# EAGLE board Radarv3 (EAGLE 6.3)
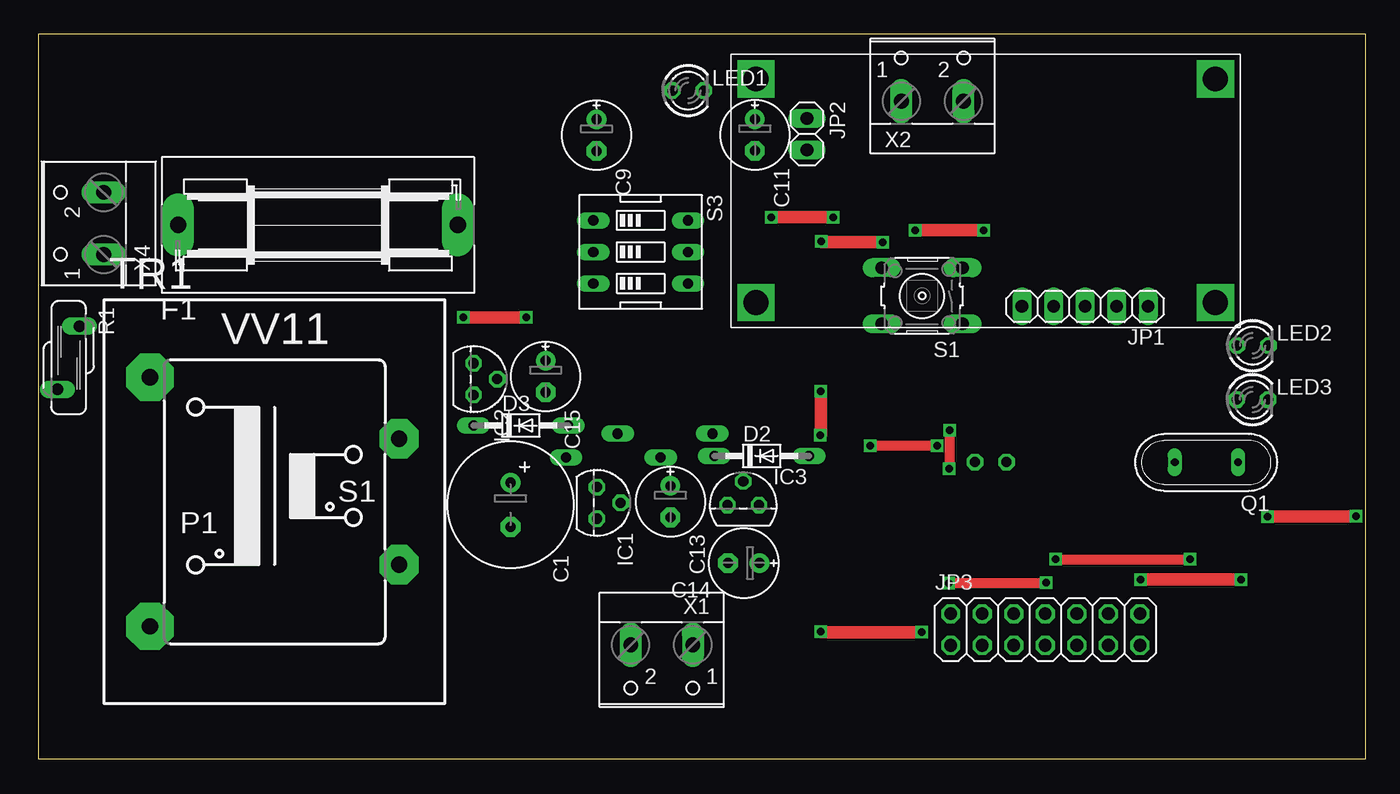
[diagram p0: board, top side]
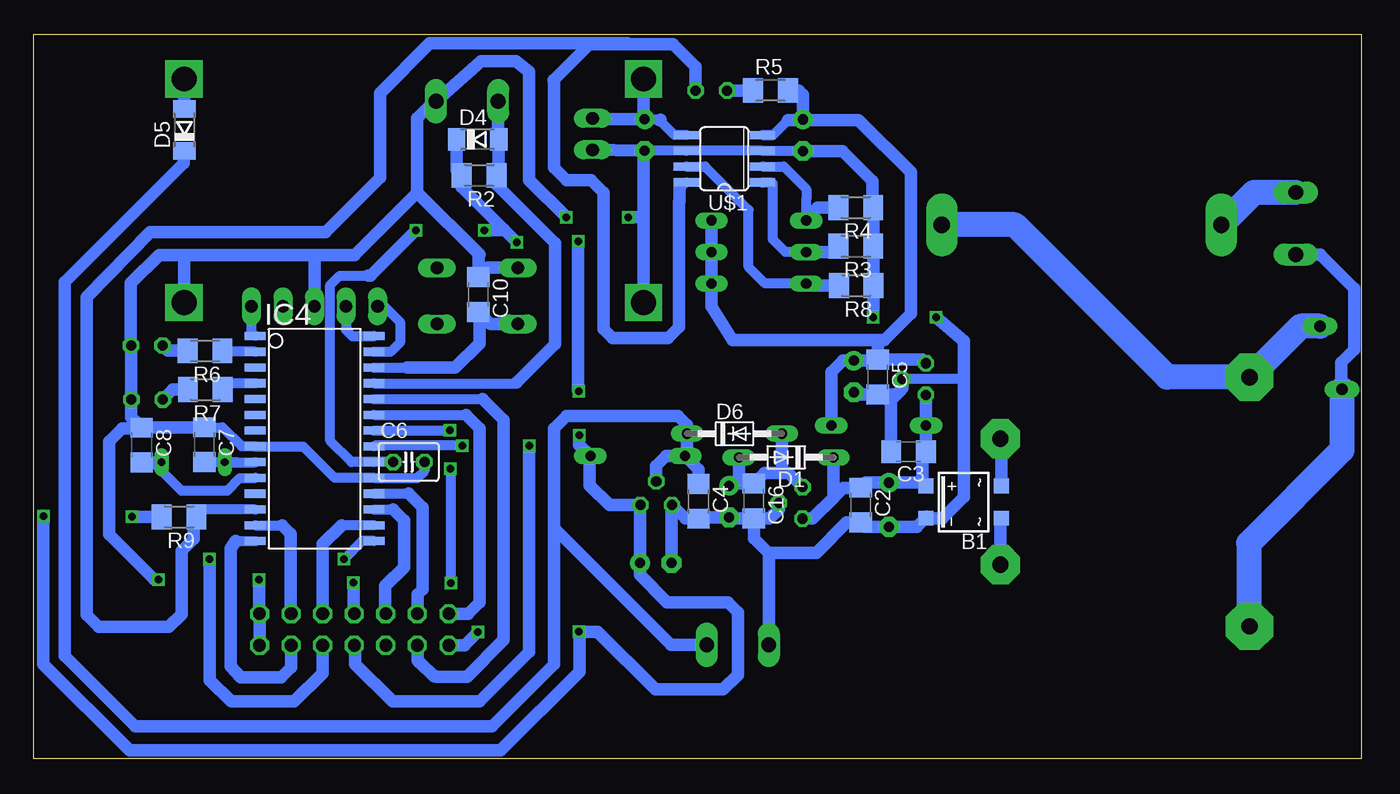
[diagram p1: board, bottom side, seen from below]

Size 106.89 x 58.33 mm. Coordinates in mm from the lower left corner, seen from the top.
Outline: 0,0 106.89,0 106.89,58.33 0,58.33 0,0
Copper layers (1*16): Top 0.035mm / dielectric 1.5mm / Bottom 0.035mm
Design rules "default": minimum track width 10mil, minimum drill 24mil, track to track 8mil, track to pad 8mil, pad to pad 8mil, via to via 8mil, smd to smd 8mil, copper to edge 40mil, drill to drill 8mil, minimum pad ring 10mil, minimum via ring 8mil, stop-mask expansion 4mil, vias tented up to drill 0mil, thermal gap 10mil

## Footprints (pad centres in the part's own frame; a part is rotated, then mirrored left to right if it is on the bottom)
SOIC-4 = smd 1.2 x 1.2: + 1.3,3.05; - -1.3,3.05; ~1 -1.3,-3.05; ~2 1.3,-3.05
E3,5-10 = drill 0.813 pad 1.6: + -1.778,0 | drill 0.813 pad 1.6 octagon: - 1.778,0
C1206 = smd 1.6 x 1.8: 1 -1.4,0; 2 1.4,0
C025-030X050 = drill 0.813 octagon: 1 -1.27,0; 2 1.27,0
E2,5-6E = drill 0.813 pad 1.575: + -1.27,0 | drill 0.813 pad 1.575 octagon: - 1.27,0
DO34-7 = drill 0.813 long: A 3.81,0; C -3.81,0
SOD80C = smd 1.4 x 1.8: A 1.7,0; C -1.7,0
SH22,5A = drill 1.321 pad 2.54 long: 1 -11.252,0; 2 11.252,0
TO92 = drill 0.813 octagon: 1 -1.27,0; 2 0,1.905; 3 1.27,0
TO-92 = drill 0.813 octagon: 1 -1.27,0; 2 0,1.905; 3 1.27,0
SO28W = smd 0.65 x 1.7: 1 -7.62,-4.78; 2 -6.35,-4.78; 3 -5.08,-4.78; 4 -3.81,-4.78; 5 -2.54,-4.78; 6 -1.27,-4.78; 7 0,-4.78; 8 1.27,-4.78; 9 2.54,-4.78; 10 3.81,-4.78; 11 5.08,-4.78; 12 6.35,-4.78; 13 7.62,-4.78; 14 8.89,-4.78; 15 8.89,4.78; 16 7.62,4.78; 17 6.35,4.78; 18 5.08,4.78; 19 3.81,4.78; 20 2.54,4.78; 21 1.27,4.78; 22 0,4.78; 23 -1.27,4.78; 24 -2.54,4.78; 25 -3.81,4.78; 26 -5.08,4.78; 27 -6.35,4.78; 28 -7.62,4.78
1X05 = drill 1.016 long: 1 -5.08,0; 2 -2.54,0; 3 0,0; 4 2.54,0; 5 5.08,0
1X02 = drill 1.016 long: 1 -1.27,0; 2 1.27,0
2X07 = drill 1.016 octagon: 1 -7.62,-1.27; 2 -7.62,1.27; 3 -5.08,-1.27; 4 -5.08,1.27; 5 -2.54,-1.27; 6 -2.54,1.27; 7 0,-1.27; 8 0,1.27; 9 2.54,-1.27; 10 2.54,1.27; 11 5.08,-1.27; 12 5.08,1.27; 13 7.62,-1.27; 14 7.62,1.27
LED3MM = drill 0.813 octagon: A -1.27,0; K 1.27,0
QS = drill 0.61 long: 1 -2.54,0; 2 2.54,0
S07K40 = drill 0.914 long: 1 -0.889,-2.54; 2 0.889,2.54
M1206 = smd 1.6 x 2: 1 -1.4,0; 2 1.4,0
B3F-10XX = drill 1.016 long: 1 -3.251,2.261; 2 3.251,2.261; 3 -3.251,-2.261; 4 3.251,-2.261
EDG-03 = drill 0.813 long: 1 -2.54,-3.81; 2 0,-3.81; 3 2.54,-3.81; 4 2.54,3.81; 5 0,3.81; 6 -2.54,3.81
VV11 = drill 1.321 pad 3.81 octagon: 1 -10.033,10.033; 5 -10.033,-10.033 | drill 1.321 pad 3.175 octagon: 7 10.033,-5.08; 9 10.033,5.08
SO08 = smd 0.66 x 2.032: 1 -1.905,-3.073; 2 -0.635,-3.073; 3 0.635,-3.073; 4 1.905,-3.073; 5 1.905,3.073; 6 0.635,3.073; 7 -0.635,3.073; 8 -1.905,3.073
STEP_UP_MOD = drill 2 square: P$1 -20,24; P$2 -20,6; P$3 17,6; P$4 17,24
W237-102 = drill 1.194 long: 1 -2.5,-1.27; 2 2.5,-1.27

## Placement (x,y rotation side)
B1  MB4S  [SOIC-4]  32.01,20.67 90 bottom
C1  [E3,5-10]  38.02,20.45 270 top
C2  [C1206]  40.31,20.42 270 bottom
C3  [C1206]  36.45,24.71 180 bottom
C4  [C1206]  53.36,20.73 270 bottom
C5  [C1206]  38.93,30.73 270 bottom
C6  [C025-030X050]  76.69,23.89 0 bottom
C7  [C1206]  93.14,25.29 270 bottom
C8  [C1206]  98.19,25.25 270 bottom
C9  [E2,5-6E]  44.95,50.21 270 top
C10  [C1206]  71.08,37.38 270 bottom
C11  [E2,5-6E]  57.7,50.23 270 top
C13  [E2,5-6E]  50.9,20.7 270 top
C14  [E2,5-6E]  56.8,15.75 180 top
C15  [E2,5-6E]  40.85,30.78 270 top
C16  [C1206]  48.9,20.75 270 bottom
D1  BAT81  [DO34-7]  46.3,24.27 180 bottom
D2  BAT81  [DO34-7]  58.25,24.38 0 top
D3  BAT81  [DO34-7]  38.85,26.83 0 top
D4  PMLL4150  [SOD80C]  71.14,49.87 0 bottom
D5  PMLL4150  [SOD80C]  94.75,50.64 90 bottom
D6  BAT81  [DO34-7]  50.46,26.17 0 bottom
F1  FUSESH22,5A  [SH22,5A]  22.52,42.98 0 top
IC1  7812L  [TO92]  44.98,20.6 270 top
IC2  7805L  [TO92]  35.05,30.57 270 top
IC3  MCP1702  [TO-92]  56.76,20.42 0 top
IC4  PIC16F1938SO  [SO28W]  84.27,26.42 270 bottom
JP1  [1X05]  84.28,36.42 180 top
JP2  BATTERY  [1X02]  61.89,50.3 270 top
JP3  [2X07]  81.08,10.4 0 top
LED1  [LED3MM]  52.32,53.81 0 top
LED2  [LED3MM]  97.78,33.27 0 top
LED3  [LED3MM]  97.76,28.92 0 top
Q1  [QS]  94.05,23.86 180 top
R1  S07K40  [S07K40]  2.44,32.29 180 top
R2  [M1206]  71.02,46.98 180 bottom
R3  [M1206]  40.69,41.27 180 bottom
R4  [M1206]  40.69,44.39 180 bottom
R5  [M1206]  47.56,53.81 0 bottom
R6  [M1206]  93.09,32.85 180 bottom
R7  [M1206]  93.07,29.73 180 bottom
R8  [M1206]  40.66,38.1 180 bottom
R9  [M1206]  95.18,19.48 180 bottom
S1  [B3F-10XX]  71.16,37.27 180 top
S3  [EDG-03]  48.5,40.81 270 top
TR1  [VV11]  19.02,20.69 0 top
U$1  MAX1811  [SO08]  51.28,48.32 90 bottom
U$2  STEP_UP_MODULE  [STEP_UP_MOD]  77.78,30.74 0 top
X1  [W237-102]  50.2,7.9 180 top
X2  [W237-102]  71.99,54.23 0 top
X4  [W237-102]  4,43.1 90 top

## Library data of the parts
B1 = rectifier
C1 C6 C9 C11 C13-C15 = rcl
C2-C5 C7 C8 C10 C16 R2-R9 = resistor
D1-D6 = diode
F1 = fuse; OC_FARNELL: unknown; OC_NEWARK: unknown
IC1 IC2 = linear
IC3 = Panos
IC4 = microchip; MPN: PIC16F1938-I/SO; OC_FARNELL: 1755828; OC_NEWARK: 08R1948
JP1-JP3 = pinhead
LED1-LED3 = led
Q1 S3 = special
R1 = varistor
S1 = switch-omron; MPN: B3F-1000; OC_FARNELL: 176432; OC_NEWARK: 36M3542
TR1 = trafo
U$1 = max1811
U$2 = step_up_mod
X1 X2 X4 = con-wago-500; MPN: 237-102; OC_FARNELL: unknown; OC_NEWARK: 70K9898

## Nets
CHG_LOGIC_OUT: IC4.12 LED1.K R9.1 U$1.8
GND: B1.- C1.- C2.2 C3.2 C4.2 C5.2 C6.2 C7.1 C8.1 C9.- C10.1 C11.- C13.- C14.- C15.- C16.2 IC1.2 IC2.2 IC3.1 IC4.8 IC4.19 JP1.3 JP2.2 JP3.13 JP3.14 LED2.K LED3.K R3.1 R4.1 R8.1 S1.4 U$1.3 U$1.6 U$2.P$2 U$2.P$3 X1.2 X2.2
N$1: F1.1 X4.2
N$2: F1.2 R1.1 TR1.1
N$3: R1.2 TR1.5 X4.1
N$4: B1.~2 TR1.9
N$5: B1.~1 TR1.7
N$6: C7.2 IC4.9 Q1.2
N$7: C8.2 IC4.10 Q1.1
N$8: B1.+ C1.+ C2.1 C3.1 D1.C D3.C IC1.3 IC2.3
N$9: D4.A IC4.25 R2.1 X2.1
N$10: LED1.A R5.1
N$11: C10.2 IC4.26 S1.2
N$12: IC4.1 JP1.1
N$13: IC4.27 JP1.5
N$14: IC4.28 JP1.4
N$15: R8.2 S3.3 U$1.7
N$16: R3.2 S3.2 U$1.1
N$17: R4.2 S3.1 U$1.2
N$18: C13.+ C16.1 D1.A D6.A IC1.1
N$19: IC4.2 R6.1
N$20: IC4.4 R7.1
N$21: LED2.A R6.2
N$22: LED3.A R7.2
N$23: IC4.14 JP3.11
N$24: C11.+ JP2.1 U$1.5 U$2.P$1
N$25: IC4.16 JP3.10
N$26: IC4.15 JP3.9
N$27: IC4.21 JP3.7
N$28: IC4.22 JP3.8
N$29: IC4.13 JP3.12
N$30: IC4.17 JP3.6
N$31: IC4.18 JP3.4
N$32: IC4.23 JP3.2
N$33: IC4.24 JP3.3
N$35: D5.A U$2.P$4
VCC: C4.1 D2.C D5.C D6.C IC3.2 X1.1
VDD: C5.1 C9.+ C15.+ D3.A IC2.1 R5.2 S3.4 S3.5 S3.6 U$1.4
VEE: C6.1 C14.+ D2.A D4.C IC3.3 IC4.20 JP3.1 R2.2 R9.2

## Tracks (layer width: path | path; a pad name or v marks a point on that pad's centre or on a via)
CHG_LOGIC_OUT
  Bottom 0.8: 54.89,46.05 54.72,46.05 U$1.8 | R9.1 93.19,20.07 IC4.12 93.53,20.07 94,19.6
  Bottom 1: LED1.K 53.59,55.72 55.4,57.53 59,57.53 | 59,57.53 62.14,57.53 65.03,54.63 | 65.03,54.63 64.98,54.68 | 54.89,46.05 54.9,46.04 54.9,44.87 54.92,44.85 54.92,34.77 55.8,33.89 60.29,33.89 61,34.6 61,45.6 62,46.6 64,46.6 65,47.6 65,54.6 65.03,54.63 | 94,19.6 94,17.71 94.96,16.75 94.96,11.64 96,10.6 101.65,10.6 102.62,11.57 102.62,37.19 97.51,42.42 83.37,42.42 79,46.79 79,53.6 75,57.6 59.07,57.6 59,57.53
GND  (via drill 0.6)
  Top 1: v39.28,35.54 v34.22,35.54 | v88.75,14.43 v96.83,14.43 | v64,43.6 v59,43.6
  Bottom 0.8: C1.- 35.93,18.67 35,19.6 | C3.2 37.85,28.45 38,28.6 37,29.6 37,30.6 32,30.6 | 35.02,19.33 B1.- | C6.2 75.42,23.18 76,22.6 76.01,22.61 IC4.19 82.65,22.61 85.16,25.12 89.02,25.12 IC4.8 89.07,25.17 90.16,25.17 91.68,26.69 C7.1 | C9.- 44.97,48.96 U$1.3 U$1.6 C11.- | 71.08,40.52 71,40.6
  Bottom 1: B1.- 35.76,18.67 C1.- 39.96,18.67 C2.2 41.43,19.02 43.87,16.58 47.74,16.58 | 47.74,16.58 48.89,17.73 C16.2 | IC1.2 46.88,20.09 47.64,19.33 48.88,19.33 C16.2 | C16.2 50.82,19.35 C13.- 53.26,19.43 C4.2 54.4,19.33 IC3.1 55.53,20.38 C14.- | IC2.2 36.95,29.85 37.48,29.33 38,29.33 | 38,29.33 C5.2 40.67,29.33 C15.- | C3.2 37.85,29.18 38,29.33 | 35.02,19.33 33.73,19.33 32,21.06 32,30.6 31.99,30.61 31.99,33.63 31.98,33.64 v34.22,35.54 | X1.2 47.7,16.54 47.74,16.58 | C7.1 98.15,26.69 C8.1 98.57,27.03 | 98.57,27.03 99.03,27.49 LED3.K 99.03,33.25 LED2.K 99.08,33.3 99.08,38.29 96.8,40.57 95,40.57 | JP2.2 58.21,48.97 C11.- 57.78,48.88 57.78,43.6 | C9.- 41.77,48.94 39.34,46.51 39.34,44.44 R4.1 R3.1 39.26,41.24 R8.1 39.26,35.56 v39.28,35.54 | U$2.P$2 57.78,43.6 | JP1.3 84.28,40.29 84,40.57 | 84,40.57 81.03,40.57 76,45.6 | 84,40.57 95,40.57 | JP3.13 JP3.14 88.75,11.67 v88.75,14.43 | v96.83,14.43 97.18,14.43 100.8,18.05 100.8,25.55 99.76,26.59 99.01,26.59 98.57,27.03 | S1.4 70.33,39.53 C10.1 71.08,40.52 | U$2.P$3 94.78,40.35 95,40.57 | 71,40.6 76,45.6 | 76,45.6 76,51.6 74.64,52.96 X2.2 70.88,56.19 68.03,56.19 67,55.31 67,46.6 v64,43.6 | v59,43.6 57.78,43.6
N$1
  Bottom 2: X4.2 8.65,45.6 F1.1
N$2
  Bottom 2: R1.1 4.88,34.83 TR1.1 15.61,30.72 27.89,43 33.75,43 F1.2
N$3
  Bottom 1: X4.1 3.3,40.6 0.56,37.86 0.56,32.96 1.6,31.92 1.6,29.8 R1.2
  Bottom 2: R1.2 1.55,24.86 9.06,17.35 9.06,10.73 TR1.5
N$4
  Bottom 1: B1.~2 28.96,25.68 TR1.9
N$5
  Bottom 1: TR1.7 29.05,19.28 B1.~1
N$6
  Bottom 0.8: IC4.9 89.07,23.86 Q1.2 90.54,23.89 C7.2
N$7
  Bottom 0.8: C8.2 97.25,23.85 95,21.6 91.28,21.6 90.29,22.59 89.07,22.59 IC4.10
  Bottom 1: Q1.1 C8.2
N$8
  Bottom 1: 35.32,22.23 C1.+ 39.9,22.23 C2.1 41.68,21.82 42.45,21.05 | 35.32,22.23 B1.+ | 42.45,21.05 44.17,19.33 IC1.3 | D1.C 42.49,21.09 42.45,21.05 | 35.32,22.23 35.32,24.44 C3.1 D3.C IC2.3
N$9
  Bottom 0.8: IC4.25 68.07,30.23 68.02,30.28
  Bottom 1: X2.1 69.49,49.92 D4.A 69.44,47.16 R2.1 69.62,46.23 64.9,41.51 64.9,33.4 68.02,30.28
N$10
  Bottom 1: R5.1 LED1.A
N$11
  Bottom 0.8: IC4.26 76.84,31.5 76.83,31.51
  Bottom 1: S1.2 70.11,35.01 C10.2 71,35.9 71,33.45 72.94,31.51 76.83,31.51
N$12
  Bottom 0.8: JP1.1 89.36,34.35 IC4.1
N$13
  Bottom 0.8: JP1.5 78.65,36.42 77.4,35.17 77.4,33.51 78.15,32.76 IC4.27
N$14
  Bottom 0.8: JP1.4 81.74,34.53 81.23,34.02 79.51,34.02 IC4.28
N$15
  Bottom 0.8: S3.3 48,38.27 49.33,39.6 49.33,44.19 52.83,47.68 U$1.7
  Bottom 1: R8.2 44.52,38.1 S3.3
N$16
  Bottom 0.8: S3.2 46.36,40.81 47.37,41.82 47.37,46.32 47.43,46.38 48.17,46.38 U$1.1
  Bottom 1: S3.2 42.55,40.81 R3.2
N$17
  Bottom 0.8: U$1.2 46.49,47.68 44.67,45.86 44.67,45.07 44.69,45.05 S3.1
  Bottom 1: S3.1 44.69,43.45 43.77,44.37 42.11,44.37 R4.2
N$18
  Bottom 1: IC1.1 44.98,21.89 46.1,23.01 47,23.01 | 47,23.01 48.04,23.01 C16.1 50,22.15 | 50,22.15 50.72,22.15 C13.+ | D1.A 50.11,22.26 50,22.15 | D6.A 46.65,23.36 47,23.01
N$19
  Bottom 0.8: IC4.2 91.61,32.77 R6.1
N$20
  Bottom 0.8: IC4.4 91.17,30.23 R7.1
N$21
  Bottom 1: R6.2 96.09,32.85 LED2.A
N$22
  Bottom 1: R7.2 95.68,29.73 LED3.A
N$23
  Bottom 0.8: 90.63,17.52 IC4.14
  Bottom 1: JP3.11 86.16,7.34 86.95,6.55 90.24,6.55 91.01,7.44 91.01,16.92 90.63,17.52
N$24
  Bottom 0.8: U$1.5 55.28,50.23 56.48,51.43 56.54,51.48 57.68,51.48 C11.+
  Bottom 1: JP2.1 60.47,51.5 C11.+ 57.78,51.58 U$2.P$1 | 56.43,51.48 56.48,51.43
N$25
  Bottom 0.8: IC4.16 82.1,18.8
  Bottom 1: 82.1,18.8 83.62,17.28 JP3.10
N$26  (via drill 0.6)
  Top 0.8: v81.91,16.05 92.7,16.05 v92.72,16.07
  Bottom 0.8: IC4.15 80.43,17.53 v81.91,16.05 | JP3.9
  Bottom 1: v92.72,16.07 92.72,6.32 91,4.6 85.91,4.6 83.63,6.88 JP3.9
N$27  (via drill 0.6)
  Top 0.8: v66.99,25.21 v72.35,25.21 v72.36,25.22
  Bottom 0.8: v67,25.2 v66.99,25.21 | v72.36,25.22 79.42,25.22 IC4.21
  Bottom 1: JP3.7 81,9.05 81,7.6 78,4.6 71,4.6 67,8.6 v67,25.2
N$28  (via drill 0.6)
  Top 0.8: v73.37,26.46 73.37,23.38 v73.34,23.35 | v73.29,14.15 81.1,14.15 v81.13,14.18
  Bottom 0.8: IC4.22 73.41,26.42 v73.37,26.46 | v73.34,23.35 73.34,14.2 v73.29,14.15 | 81.13,11.72 JP3.8
  Bottom 1: v81.13,14.18 81.13,11.72
N$29
  Bottom 0.8: IC4.13 86.88,18.8 | 86.19,11.7 JP3.12
  Bottom 1: 86.88,18.8 86.19,18.11 86.19,11.7
N$30
  Bottom 0.8: IC4.17 77.96,20.07 | 78.59,11.72 JP3.6
  Bottom 1: 77.96,20.07 77.07,19.18 77.07,15.42 78.59,13.9 78.59,11.72
N$31
  Bottom 0.8: IC4.18 76.7,21.34 | JP3.4
  Bottom 1: 76.7,21.34 75.58,20.22 75.58,13.65 75.99,13.24 JP3.4
N$32
  Bottom 0.8: IC4.23 72.09,27.69
  Bottom 1: JP3.2 71.93,11.67 71,12.6 71,26.6 72.09,27.69
N$33
  Bottom 0.8: IC4.24 70.74,28.96
  Bottom 1: 70.74,28.96 69.04,27.26 69.04,9.56 72,6.6 74.46,6.6 74.47,6.61 74.66,6.61 75.82,7.77 75.84,7.77 75.98,7.91 75.98,9.11 JP3.3
N$35
  Bottom 1: U$2.P$4 94.78,52.37 D5.A
VCC
  Bottom 1: C4.1 53.36,23.3 D2.C | IC3.2 56.76,23.59 55.97,24.38 D2.C | D2.C 54.27,24.55 D6.C 54.28,26.88 55,27.6 64,27.6 65,26.6 65,18.6 | X1.1 55.57,9.17 65,18.6 | 65,18.6 65,7.6 70,2.6 98.72,2.6 104.4,8.28 104.4,38.37 94.8,47.97 94.8,48.89 D5.C
VDD
  Bottom 0.8: C9.+ 44.98,51.45 46.12,51.45 47.34,50.23 U$1.4 47.35,50.23 46.15,51.43
  Bottom 1: C5.1 39.01,32.05 C15.+ 40.87,32.07 41.71,32.07 42.66,31.12 D3.A | C5.1 35.34,32.13 IC2.1 | S3.6 S3.5 S3.4 52.33,38.25 52.33,36.41 50.62,33.7 39,33.7 | 46.35,53.62 R5.2 45.26,53.8 44.95,53.49 C9.+ | 46.15,51.43 40.47,51.43 36.26,47.22 36.26,35.86 38.39,33.73 38.97,33.73 39,33.7 | C5.1 38.93,33.63 39,33.7
VEE  (via drill 0.6)
  Top 1: v71.13,10.19 63.04,10.19 v63,10.23 | v68,41.6 63.11,41.6 v63.05,41.66 | v63,29.6 63,26.1 v62.96,26.06 | v98.96,19.49 106.08,19.49 v106.1,19.51 | v76.11,42.56 v70.6,42.56
  Bottom 0.8: IC4.20 C6.1 81.29,23.89 83,25.6 83,38.15 82.25,38.9 79.97,38.9
  Bottom 1: D4.C 72.84,47.4 R2.2 72.42,46.02 69,42.6 | JP3.1 72.19,9.13 v71.13,10.19 | 69,42.6 v68,41.6 | v63.05,41.66 63.05,29.65 v63,29.6 | v62.96,26.06 62.96,25.28 D2.A 62.12,24.32 62.12,22.01 60.53,20.42 IC3.3 58.07,20.38 C14.+ 58.07,14.78 55.89,12.6 51,12.6 50.2,11.8 50.2,6.77 51.38,5.59 56.84,5.59 61.48,10.23 v63,10.23 62.94,10.17 62.94,7 69.28,0.66 99.17,0.66 106.1,7.59 v106.1,19.51 | R9.2 v98.95,19.48 v98.96,19.49 | 79.97,38.9 79.77,38.9 v76.11,42.56 | v70.6,42.56 69.04,42.56 69,42.6